# Altium PCB Layout.PcbDoc
Units mm, origin at the board's own origin, x right, y up, seen from the top; angles counter-clockwise.
Board outline 26 x 15 mm, 2 copper layers (Top Layer, Bottom Layer); 16 components, 7 nets, 31 pads, 1 vias.
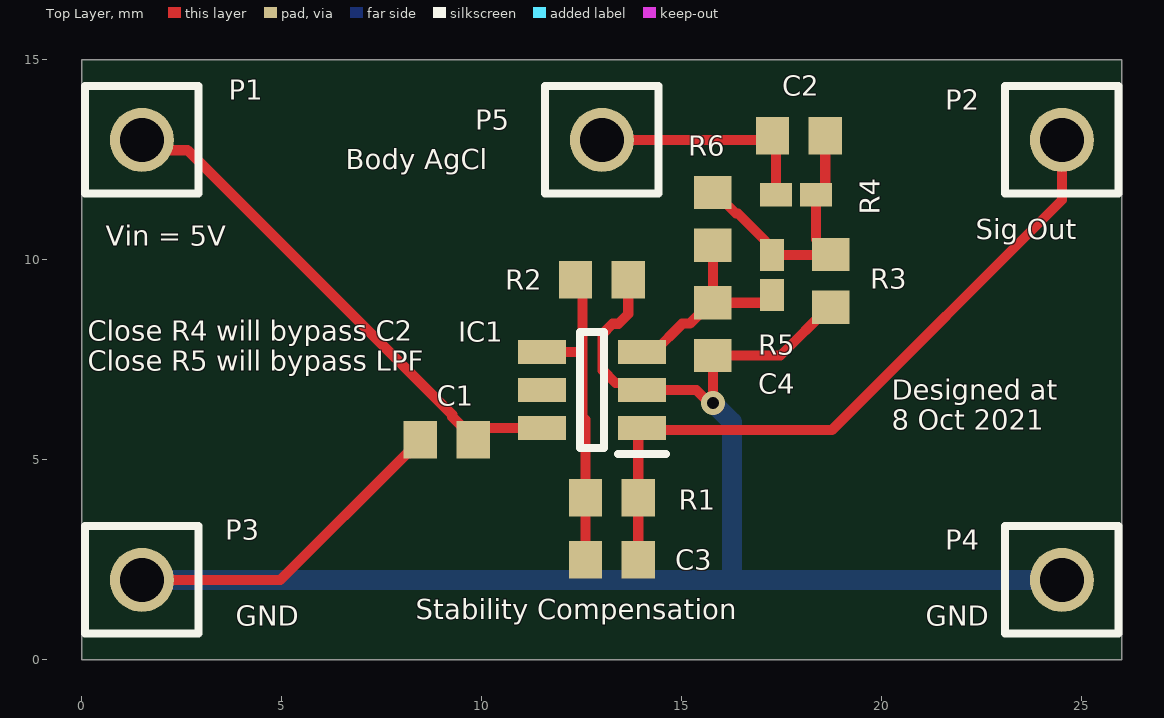
[diagram p0: Top Layer view]
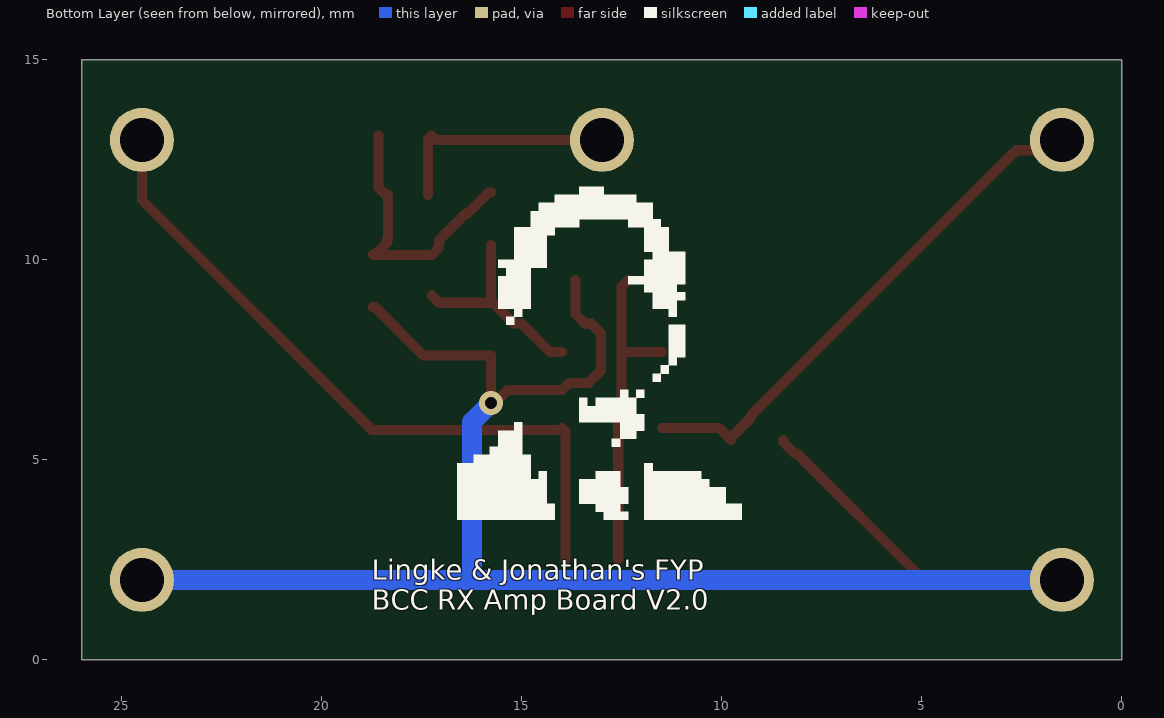
[diagram p1: Bottom Layer view, seen from below]
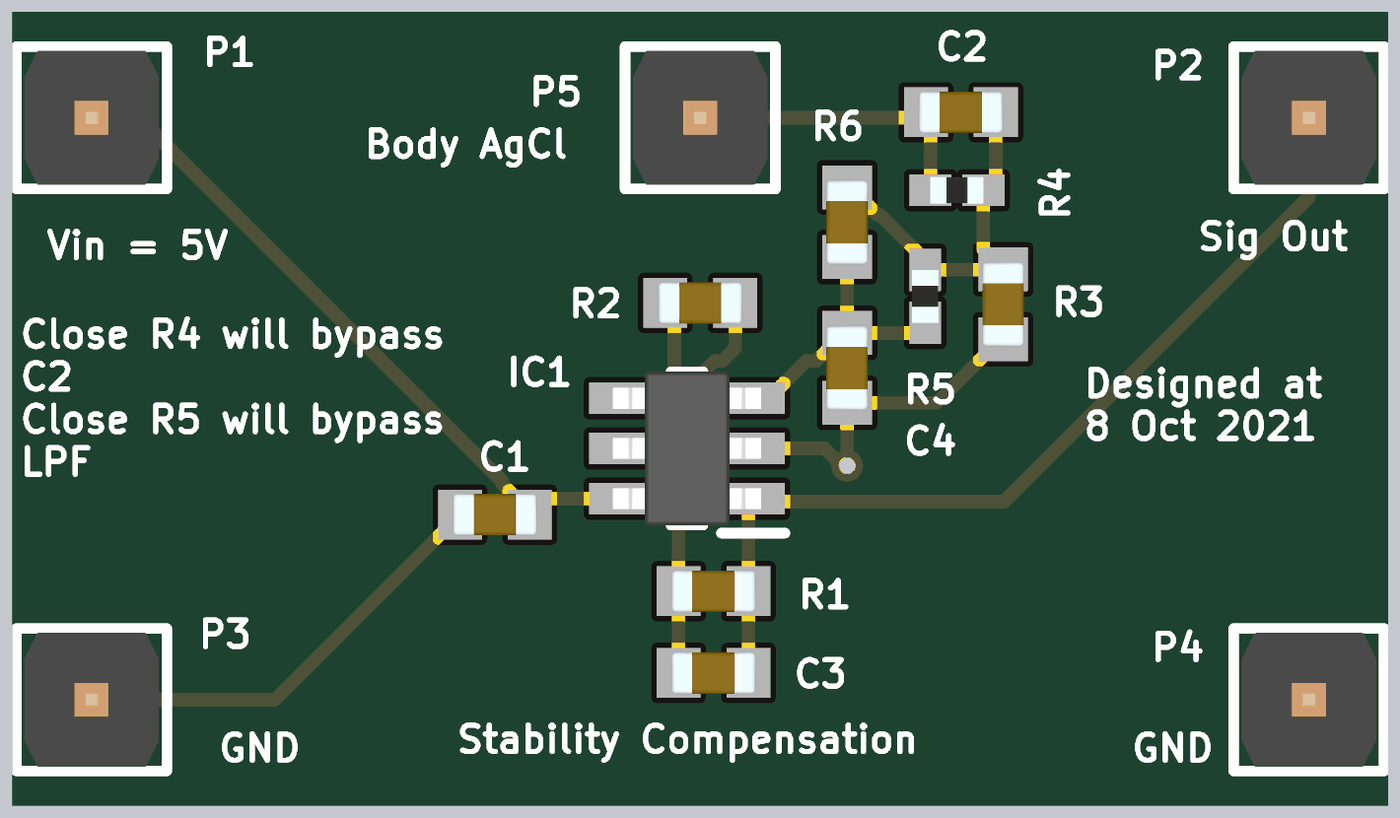
[diagram p2: 3D render of the assembled board from above, using the file's embedded part models]

## Layer stack, top to bottom
Top Solder: solder mask 0.0102, Solder Resist, Dk 3.5
Top Layer: signal copper 0.0356
Dielectric 1: dielectric 0.32, FR-4, Dk 4.8
Bottom Layer: signal copper 0.0356
Bottom Solder: solder mask 0.0102, Solder Resist, Dk 3.5

## Board outline
0,15 0,0 26,0 26,15

## Design rules (kind name [scope] priority, off if disabled: settings)
Clearance [All] p1: gap=0.254 ignorepadtopadclearanceinfootprint=TRUE except(0: Arc-Hole Track-Hole SMDPad-Hole THPad-Hole Via-Hole Fill-Hole Poly-Hole Region-Hole Text-Hole)
MinimumSolderMaskSliver [All] p1: minsoldermaskwidth=0.1
PolygonConnect [All] p1: connectstyle=Relief reliefconductorwidth=0.254 reliefentries=4 polygonreliefangle="90 Angle" airgapwidth=0.254
RoutingVias [All] p1: holewidth=0.711 width=1.27 viastyle="Through Hole" minholewidth=0.3 minwidth=0.6 maxholewidth=0.711 maxwidth=1.27
SilkToSolderMaskClearance [IsPad] p1: minsilkscreentomaskgap=0.1 clearancetoexposedcopper=TRUE
SolderMaskExpansion [All] p1: expansion=0.102 istentingtop=FALSE
Width GND [InNet('GND')] p1: maxlimit=1 minlimit=0.254 preferedwidth=0.254
Width [All] p2: maxlimit=0.254 minlimit=0.254 preferedwidth=0.254
28 further rules are at their usual default settings.

## Components (designator, comment, footprint, x,y, rotation, side; value= is the part's Value field where it differs from the comment)
C1 "0.1uF" 0603 9.121,5.5 r0 top
C2 "33p" 0603 17.924,13.103 r0 top
C3 "5pF" 0603 13.25,2.506 r180 top
C4 "LPF C" 0603 15.774,8.271 r90 top
IC1 "LTC6252" SOT-23-6 12.75,6.75 r180 top
P1 "61300111121" 61300111121 1.5,13 r0 top
P2 "61300111121" 61300111121 24.5,13 r0 top
P3 "61300111121" 61300111121 1.5,2 r0 top
P4 "61300111121" 61300111121 24.5,2 r0 top
P5 "61300111121" 61300111121 13,13 r0 top
R1 "50k" 0603 13.25,4.051 r0 top
R2 "1k" 0603 13,9.5 r180 top
R3 "33k" 0603 18.723,9.475 r90 top
R4 "0R" 0402 17.849,11.629 r0 top
R5 "Resistor 0402" 0402 17.249,9.625 r270 top
R6 "LPF R" 0603 15.775,11.025 r90 top

## Footprints (in the part's own frame and the unit in brackets; to place one, negate y for a bottom-side part, rotate by r counter-clockwise, add the part's x,y. Pads: shape width x height; smd on the part's side, far side on the other; paste and mask are expansions set on the pad)
0402 [mm]
  rect 0.8x0.6 smd mask+0.102: 1(-0.5,0) 2(0.5,0)
  body extent -0.5,-0.25 0.5,0.25, height 0.35
0603 [mm]
  rect 0.83x0.94 smd: 1(-0.66,0) 2(0.66,0)
  body extent -0.8,-0.4 0.8,0.4, height 0.9
61300111121 [mm] "Pin Header, pitch 2.54 mm, THT, Vertical, single row, 1p"
  round 1.6 hole 1.1: 1(0,0)
  silkscreen extent -1.42,-1.35 1.42,1.35, body extent -1.27,-1.27 1.27,1.27, height 8.57
SOT-23-6 [mm]
  rect 1.2x0.6 smd: 1(-1.25,0.95) 2(-1.25,0) 3(-1.25,-0.95) 4(1.25,-0.95) 5(1.25,0) 6(1.25,0.95)
  silkscreen extent -1.85,-1.45 0.3,1.6, body extent -1.4,-1.45 1.4,1.45, height 1.2

## Part data
C1 C2 C3 C4: library part Capacitor, "Capacitor"
IC1: Supplier Part Number 1=584-LTC6252CS6TRMPBF, Supplier 1=Mouser
P1 P2 P3 P4 P5: "WR-PHD Pin Header, THT, pitch 2.54mm, Single Row, Vertical, 1p", Contact Resistance=20mOhm, Manufacturer="Wurth Elektronik", Operating Temperature="-40 to +105degC", Rated Current=3A, Withstanding Voltage=500VAC, Working Voltage=250VAC, ComponentLink1Description=Manufacturer, ComponentLink1URL=http://www.we-online.de, ComponentLink2Description=Datasheet, ComponentLink2URL=https://www.we-online.com/catalog/datasheet/61300111121.pdf, Gender="Pin Header", Manufacturer Part Number=61300111121, Mounting Technology=THT, Orientation=Vertical, Packaging=Bag, Pin Number=1, Pitch=2.54mm, Published Date="May 2020", Row Number=Single
R1 R2 R3 R6: library part "Resistor 0603", "Resistor"
R4: library part "Resistor 0402"

## Via types
v1: diameter 0.6, hole 0.3, Top Layer to Bottom Layer, 1 vias

## Nets (pads, with @x,y where several pads share a name; then routed paths per layer and width w, separated by ;. In a path a pad name is that pad's centre, name@x,y a point inside that pad or via, vN(x,y) a via of type N, cw(c..) or ccw(c..) an arc to the next point about the centre after c; other vN are vias at no path point)
GND: C1.1 C4.1 IC1.2 P3.1 P4.1 R2.1 R3.1 | length 46.4
  Top Layer w0.254: P3.1 4.961,2 8.118,5.157 8.173,5.157 8.461,5.445 C1.1 ; R2.1 13.66,8.649 13.414,8.403 13.265,8.403 13.019,8.158 13.019,7.242 13.338,6.923 13.827,6.923 IC1.2 15.356,6.75 15.681,6.425 v1(15.775,6.425) C4.1 17.464,7.611 18.668,8.815 R3.1
  Bottom Layer w0.5: P3.1 16.25,2 ; v1(15.775,6.425) 16.25,5.95 16.25,2 ; P4.1 16.25,2
NetC2_1: C2.1 P5.1 R4.1 | length 5.8
  Top Layer w0.254: P5.1 17.161,13 C2.1 17.349,13.018 R4.1
NetC2_2: C2.2 R3.2 R4.2 R5.1 R6.2 | length 7
  Top Layer w0.254: R6.2 15.83,11.685 16.354,11.161 16.403,11.161 17.076,10.488 17.076,10.298 R5.1 18.713,10.125 R3.2 18.668,10.135 18.38,10.423 18.38,10.478 18.349,10.509 R4.2 18.411,11.629 18.584,11.802 C2.2
NetC3_2: C3.2 IC1.4 R1.1 R2.2 | length 8.2
  Top Layer w0.254: IC1.4 12.39,7.7 12.511,7.579 ; R2.2 12.511,9.329 12.511,6.086 12.59,6.007 C3.2
NetC4_2: C4.2 IC1.3 R5.2 R6.1 | length 5.3
  Top Layer w0.254: IC1.3 14.3,7.7 15.007,8.407 15.195,8.407 15.719,8.931 C4.2 ; R6.1 C4.2 ; R5.2 17.249,9.104 17.076,8.931 C4.2
Sig_out: C3.1 IC1.1 P2.1 R1.2 | length 17.7
  Top Layer w0.254: C3.1 R1.2 13.91,5.71 IC1.1 14.056,5.744 18.744,5.744 24.5,11.5 P2.1
Vin: C1.2 IC1.6 P1.1 | length 13.3
  Top Layer w0.254: P1.1 1.758,12.742 2.642,12.742 9.257,6.128 9.257,6.079 9.781,5.555 C1.2@9.781,5.512 ; C1.2 C1.2@9.781,5.512 ; IC1.6 10.069,5.8 C1.2@9.781,5.512
pads on no net: IC1.5

## Silkscreen, mask and mechanical layers (free items; w line width, h text height)
Top Overlay:
  text "Body AgCl" at 6.6,12.267 h0.5
  text "Sig Out" at 22.35,10.517 h0.5
  text "Vin = 5V" at 0.6,10.35 h0.5
  text "Close R4 will bypass C2 / Close R5 will bypass LPF" at 0.15,7.225 h0.5
  text "Designed at / 8 Oct 2021" at 20.25,5.75 h0.5
  text "Stability Compensation" at 8.35,1.017 h0.5
  text "GND" at 3.85,0.85 h0.5
  text "GND" at 21.1,0.85 h0.5
Bottom Overlay:
  drawing of 6 lines, arcs and shapes, not listed
  text "Lingke & Jonathan's FYP / BCC RX Amp Board V2.0" at 18.75,1.25 h0.5
Board Outline:
  the board outline again, w0.2